# Altium PCB Bio_lock.PcbDoc
Units mm, origin at the board's own origin, x right, y up, seen from the top; angles counter-clockwise.
Board outline 73.66 x 101.6 mm, 2 copper layers (Top Layer, Bottom Layer); 17 components, 17 nets, 73 pads, 0 vias.
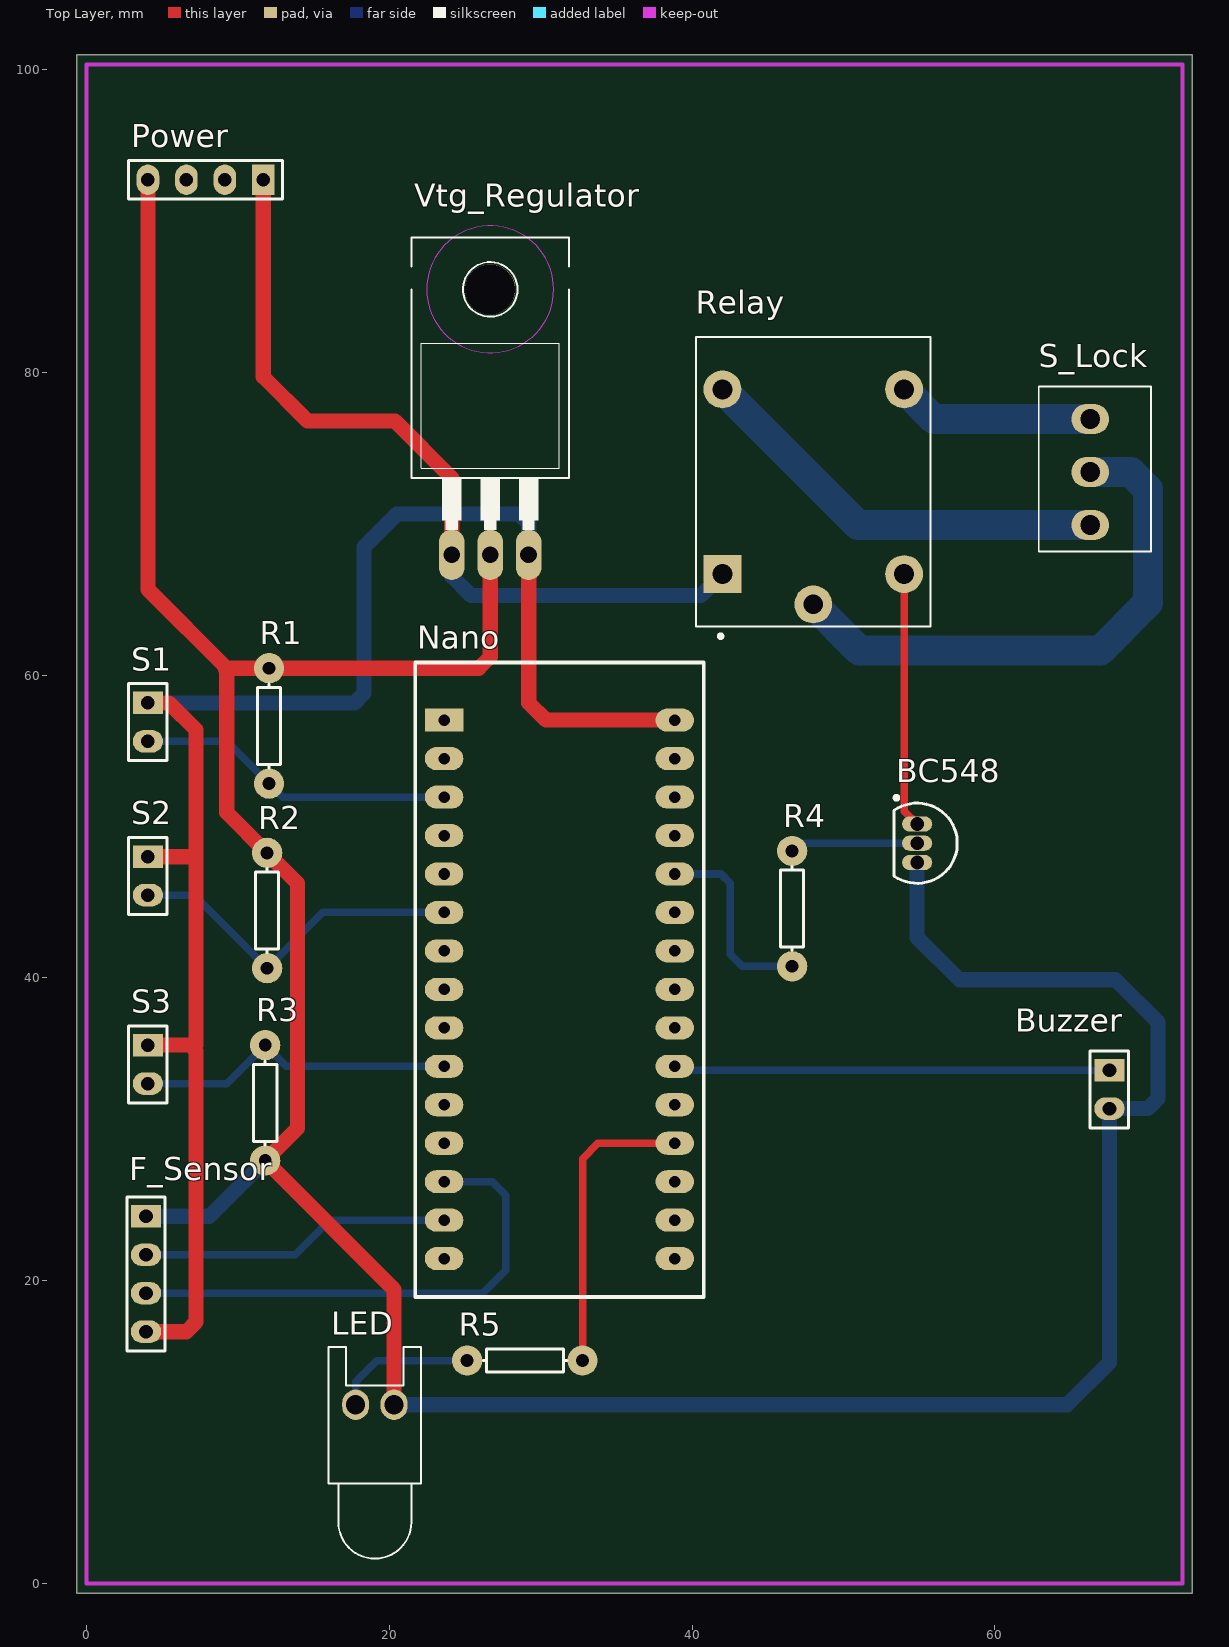
[diagram p0: Top Layer view]
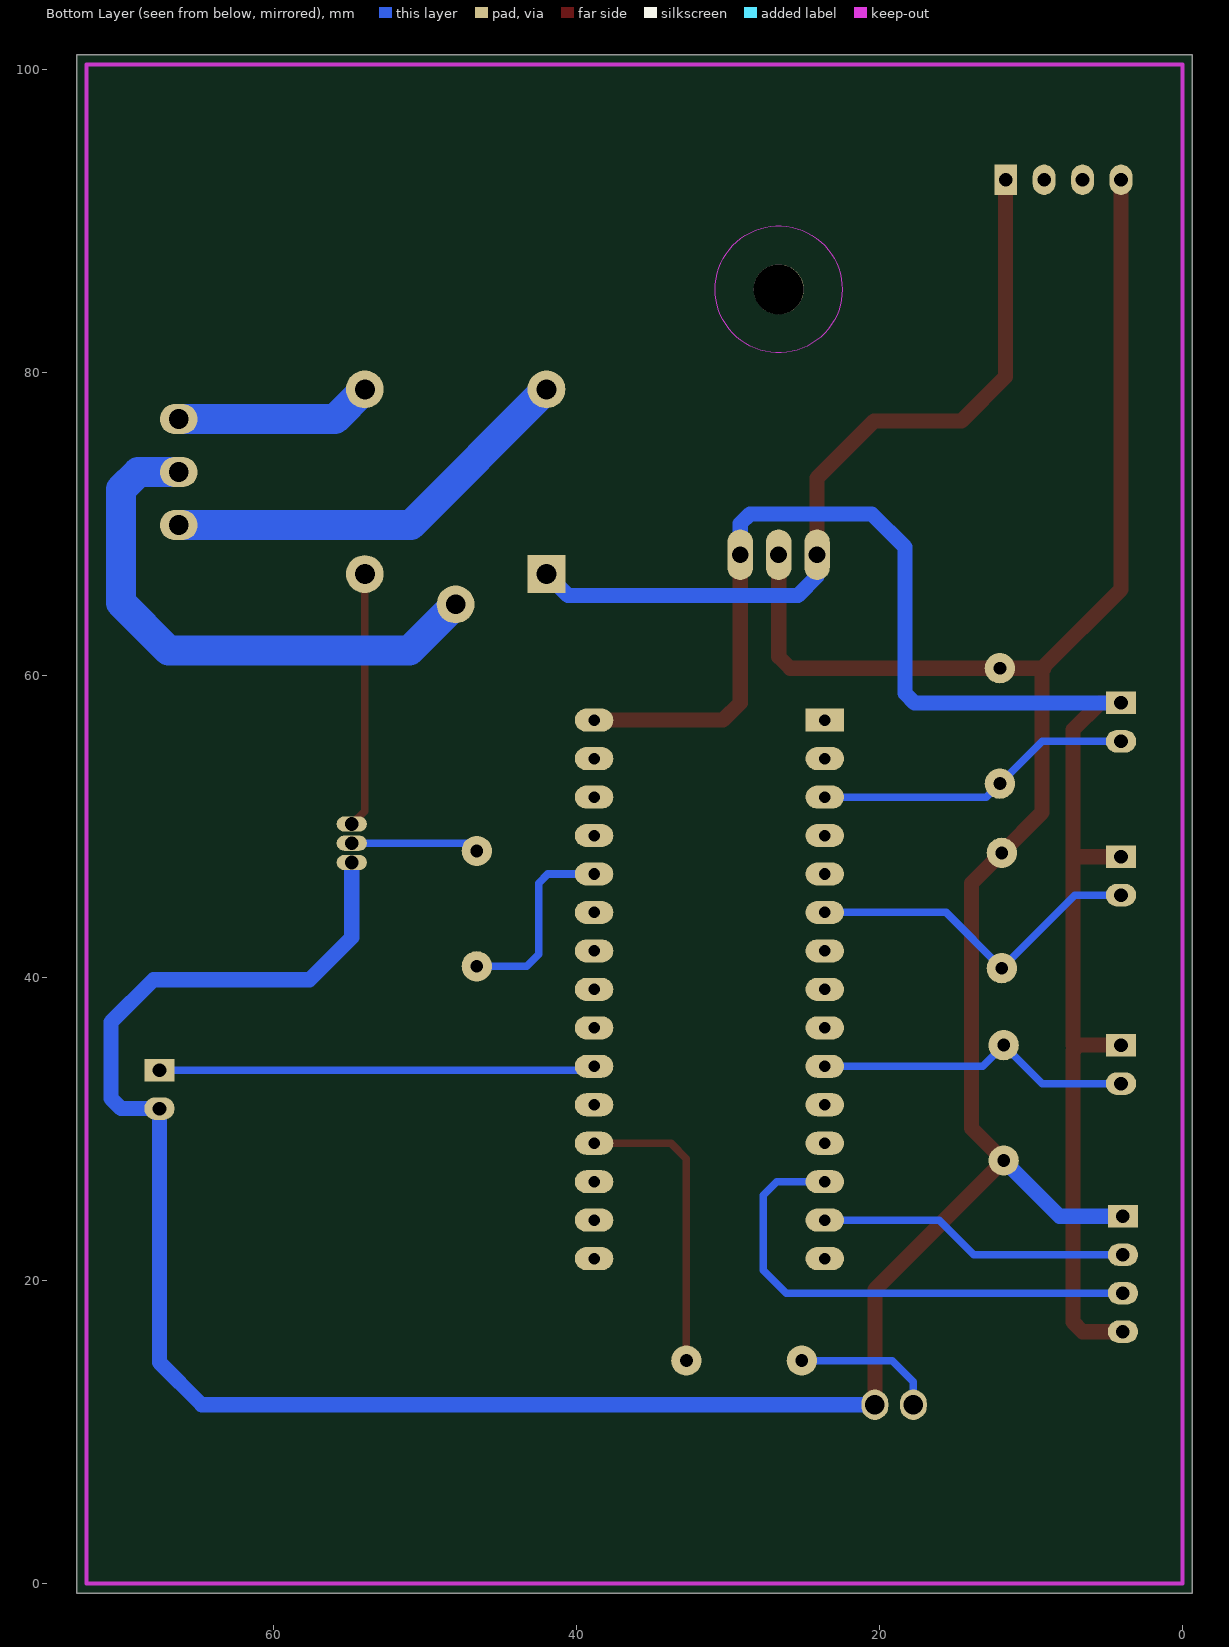
[diagram p1: Bottom Layer view, seen from below]

## Layer stack, top to bottom
Top Solder: solder mask 0.0102, Solder Resist, Dk 3.5
Top Layer: signal copper 0.0356
Dielectric 1: dielectric 0.32, FR-4, Dk 4.8
Bottom Layer: signal copper 0.0356
Bottom Solder: solder mask 0.0102, Solder Resist, Dk 3.5

## Board outline
-0.635,-0.635 73.025,-0.635 73.025,100.965 -0.635,100.965

## Design rules (kind name [scope] priority, off if disabled: settings)
Clearance [All] p1: gap=0.254 ignorepadtopadclearanceinfootprint=TRUE except(0: Arc-Hole Track-Hole SMDPad-Hole THPad-Hole Via-Hole Fill-Hole Poly-Hole Region-Hole Text-Hole; 0.5: Arc-THPad Track-THPad; 1: Arc-Arc Arc-Track Track-Track)
PolygonConnect [All] p1: connectstyle=Relief reliefconductorwidth=0.254 reliefentries=4 polygonreliefangle="90 Angle" airgapwidth=0.254
RoutingVias [All] p1: holewidth=0.711 width=1.27 viastyle="Through Hole" minholewidth=0.711 minwidth=1.27 maxholewidth=0.711 maxwidth=1.27
SolderMaskExpansion [All] p1: expansion=0.102
Width SOLENOID [(InNet('NetRelay_COM') OR InNet('NetRelay_NC') OR InNet('NetRelay_NO'))] p1: maxlimit=2 minlimit=2 preferedwidth=2
Width POWER [(InNet('GND') OR InNet('VCC') OR InNet('Vreg'))] p2: maxlimit=1 minlimit=0.5 preferedwidth=1
Width SIGNAL [All] p3: maxlimit=0.5 minlimit=0.5 preferedwidth=0.5
30 further rules are at their usual default settings.

## Components (designator, comment, footprint, x,y, rotation, side; value= is the part's Value field where it differs from the comment)
BC548 "NPN" TO-226-AA 54.864,48.895 r180 top
Buzzer "Header 2" HDR1X2 67.564,33.909 r270 top
F_Sensor "Header 4" HDR1X4 3.937,24.257 r270 top
LED "LED0" LED-0 19.05,11.811 r0 top
Nano "ARDUINO NANO" NANO 23.622,57.023 r0 top
Power "Header 4" HDR1X4 11.684,92.71 r180 top
R1 "Res1" AXIAL-0.3 12.065,56.642 r90 top value=10K
R2 "Res1" AXIAL-0.3 11.938,44.45 r90 top value=10K
R3 "Res1" AXIAL-0.3 11.811,31.75 r270 top value=10K
R4 "Res1" AXIAL-0.3 46.609,44.577 r90 top value=330
R5 "Res1" AXIAL-0.3 28.956,14.732 r0 top value=330
Relay "SRD-05VDC-SL-C" *RELAY_SRD-05VDC-SL-C_SRD-05VDC-SL-C(Primary) 48.006,72.771 r90 top
S1 "Header 2" HDR1X2 4.064,58.166 r270 top
S2 "Header 2" HDR1X2 4.064,48.006 r270 top
S3 "Header 2" HDR1X2 4.064,35.56 r270 top
S_Lock "691214110003" *691214110003 66.294,73.406 r270 top
Vtg_Regulator "LM7805" *TO220 26.67,74.295 r0 top

## Footprints (in the part's own frame and the unit in brackets; to place one, negate y for a bottom-side part, rotate by r counter-clockwise, add the part's x,y. Pads: shape width x height; smd on the part's side, far side on the other; paste and mask are expansions set on the pad)
*691214110003 [mm]
  oval 2x2.5 hole 1.3: 1(-3.5,0) 2(0,0) 3(3.5,0)
  silkscreen extent -5.65,-3.4 5.25,4
*RELAY_SRD-05VDC-SL-C_SRD-05VDC-SL-C(Primary) [mm]
  rect 2.5x2.5 hole 1.32: A1(-6.1,6)
  round 2.5 hole 1.32: A2(-6.1,-6) NC(6.1,6) NO(6.1,-6)
  round 2.5 hole 1.29: COM(-8.1,0)
  silkscreen extent -10.3,-7.75 9.55,7.75
*TO220 [mil]
  oval 66x132 hole 44: 1(-100,-250) 2(0,-250) 3(100,-250)
  round 130 hole 130 unplated: None(0,440)
  Keep-Out Layer circle w0: c0,440 r165
  Keep-Out Layer circle w0: c0,440 r165
  Keep-Out Layer circle w0: c0,440 r165
  Keep-Out Layer circle w0: c0,440 r165
  Keep-Out Layer circle w0: c0,440 r165
  Keep-Out Layer circle w0: c0,440 r165
  silkscreen extent -205,-185 205,575
AXIAL-0.3 [mm] "Axial Device, Thru-Hole; 2 Leads; 0.3 in Pin Spacing"
  round 2 hole 0.85: 1(-3.81,0) 2(3.81,0)
  silkscreen extent -2.77,-0.76 2.77,0.76
HDR1X2 [mm] "Connector; Header; 2 Position"
  rect 1.5x2 hole 0.9: 1(0,0)
  oval 1.5x2 hole 0.9: 2(2.54,0)
  silkscreen extent -1.27,-1.27 3.81,1.27
HDR1X4 [mm] "Connector; Header; 4 Position"
  rect 1.5x2 hole 0.9: 1(0,0)
  oval 1.5x2 hole 0.9: 2(2.54,0) 3(5.08,0) 4(7.62,0)
  silkscreen extent -1.27,-1.27 8.89,1.27
LED-0 [mm] "LED; 2 Leads"
  oval 1.778x2 hole 1.27: 1(1.27,0) 2(-1.27,0)
  silkscreen extent -3.05,-10.16 3.05,3.81
NANO [mil]
  rect 100x60 hole 30: 1(0,0)
  oval 100x60 hole 30: 2(0,-100) 3(0,-200) 4(0,-300) 5(0,-400) 6(0,-500) 7(0,-600) 8(0,-700) 9(0,-800) 10(0,-900) 11(0,-1000) 12(0,-1100) 13(0,-1200) 14(0,-1300) 15(0,-1400) 16(600,-1400) 17(600,-1300) 18(600,-1200) 19(600,-1100) 20(600,-1000) 21(600,-900) 22(600,-800) 23(600,-700) 24(600,-600) 25(600,-500) 26(600,-400) 27(600,-300) 28(600,-200) 29(600,-100) 30(600,0)
  silkscreen extent -75,-1500 675,150, body extent -70,-1495 670,155, height 394
TO-226-AA [mm] "TO, Flat Index; 3 In-Line, Axial Leads; Body Dia. 4.8mm; Leads 0.55 x 0.51 mm (max)"
  oval 2x1 hole 0.9: 1(0,-1.27) 2(0,0) 3(0,1.27)
  silkscreen extent -2.65,-3.13 1.52,2.65, body extent -2.65,-2.66 1.52,2.66, height 5.33

## Part data
BC548: "NPN Bipolar Transistor", Code_JEDEC=TO-226-AA, LatestRevisionDate=17-Jul-2002, LatestRevisionNote="Re-released for DXP Platform.", PackageDescription="TO, Flat Index; 3 In-Line, Axial Leads; Body Dia. 4.8mm; Leads 0.55 x 0.51 mm (max)", PackageReference=TO-226-AA, Published=8-Jun-2000, Publisher="Altium Limited"
Buzzer S1 S2 S3: "Header, 2-Pin", LatestRevisionDate=17-Jul-2002, LatestRevisionNote="Re-released for DXP Platform.", Publisher="Altium Limited"
F_Sensor Power: "Header, 4-Pin", LatestRevisionDate=17-Jul-2002, LatestRevisionNote="Re-released for DXP Platform.", Publisher="Altium Limited"
LED: "Typical INFRARED GaAs LED", LatestRevisionDate=08-Jul-2005, LatestRevisionNote="Mech Layer 1 removed.", PackageDescription="LED; 2 Leads", PackageReference=LED-0, Published=8-Jun-2000, Publisher="Altium Limited"
Nano: library part NANO
R1 R2 R3 R4 R5: "Resistor", LatestRevisionDate=17-Jul-2002, LatestRevisionNote="Re-released for DXP Platform.", PackageDescription="Axial Device, Thru-Hole; 2 Leads; 0.3 in Pin Spacing", PackageReference=AXIAL-0.3, Published=8-Jun-2000, Publisher="Altium Limited"
Relay: "5V Trigger Relay Module For Arduino And Raspberry Pi 5V Trigger Relay Module For Arduino And Raspberry Pi", Package=None, Availability=Unavailable, MF="Songle Relay", MP=SRD-05VDC-SL-C, Price=None, SnapEDA_Link=https://www.snapeda.com/parts/SRD-05VDC-SL-C/Songle%20Relay/view-part/1029484/?ref=snap
S_Lock: "3 Position Wire to Board Terminal Block Horizontal with Board 0.138 _3.50mm_ Through Hole", Package=None, Availability=Unavailable, MF="Wurth Electronics", MP=691214110003, Price=None, SnapEDA_Link=https://www.snapeda.com/parts/691214110003/Wurth%20Electronics%20Inc./view-part/1195098/?ref=snap
Vtg_Regulator: "Linear Voltage Regulator IC 1 Output 1.5A SOT-223-4", Package="TO-220 Texas Instruments", Availability=Unavailable, MF="Texas Instruments", MP=LM7805, Price=None, SnapEDA_Link=https://www.snapeda.com/parts/LM7805/Texas%20Instruments/view-part/2302466/?ref=snap

## Nets (pads, with @x,y where several pads share a name; then routed paths per layer and width w, separated by ;. In a path a pad name is that pad's centre, name@x,y a point inside that pad or via, vN(x,y) a via of type N, cw(c..) or ccw(c..) an arc to the next point about the centre after c; other vN are vias at no path point)
GND: BC548.3 Buzzer.2 F_Sensor.1 LED.1 Power.4 R1.2 R2.2 R3.2 Vtg_Regulator.2 | length 219.8
  Top Layer w1: Power.4 4.064,65.659 9.271,60.452 ; 9.144,60.452 9.271,60.452 ; LED.1 20.32,19.431 R3.2 13.945,30.074 13.945,46.253 R2.2 9.271,50.927 9.271,60.452 ; Vtg_Regulator.2 26.67,61.214 25.908,60.452 R1.2 9.271,60.452
  Bottom Layer w1: F_Sensor.1 8.128,24.257 R3.2 ; LED.1 64.77,11.811 67.564,14.605 Buzzer.2 70.104,31.369 70.763,32.028 70.763,37.084 67.969,39.878 57.658,39.878 54.864,42.672 BC548.3@54.864,47.145
NetBC548_1: BC548.1 Relay.A2 | length 16.9
  Top Layer w0.5: Relay.A2 54.006,51.023 BC548.1
NetBC548_2: BC548.2 R4.2 | length 8.5
  Bottom Layer w0.5: R4.2 47.117,48.895 BC548.2
NetBuzzer_1: Buzzer.1 Nano.21 | length 28.8
  Bottom Layer w0.5: Nano.21 39.116,33.909 Buzzer.1
NetF_Sensor_2: F_Sensor.2 Nano.14 | length 20.6
  Bottom Layer w0.5: F_Sensor.2 13.792,21.717 16.078,24.003 Nano.14
NetF_Sensor_3: F_Sensor.3 Nano.13 | length 33.8
  Bottom Layer w0.5: F_Sensor.3 26.162,19.177 27.686,20.701 27.686,25.654 26.797,26.543 Nano.13
NetLED_2: LED.2 R5.1 | length 9.5
  Bottom Layer w0.5: LED.2 17.78,13.335 19.177,14.732 R5.1
NetNano_3: Nano.3 R1.1 S1.2 | length 21.1
  Bottom Layer w0.5: S1.2 9.271,55.626 R1.1 12.954,51.943 Nano.3
NetNano_6: Nano.6 R2.1 S2.2 | length 23.1
  Bottom Layer w0.5: S2.2 7.112,45.466 R2.1 15.621,44.323 Nano.6
NetNano_10: Nano.10 R3.1 S3.2 | length 21.2
  Bottom Layer w0.5: S3.2 9.271,33.02 R3.1 13.208,34.163 Nano.10
NetNano_19: Nano.19 R5.2 | length 19.9
  Top Layer w0.5: R5.2 32.766,28.067 33.782,29.083 Nano.19
NetNano_26: Nano.26 R4.1 | length 13.9
  Bottom Layer w0.5: Nano.26 41.91,46.863 42.513,46.26 42.513,41.561 43.307,40.767 45.974,40.767 46.609,41.402 R4.1
NetRelay_COM: Relay.COM S_Lock.2 | length 36.4
  Bottom Layer w2: Relay.COM 51.057,61.62 66.954,61.62 70.104,64.77 70.104,72.263 68.961,73.406 S_Lock.2
NetRelay_NC: Relay.NC S_Lock.3 | length 28
  Bottom Layer w2: Relay.NC 50.971,69.906 S_Lock.3
NetRelay_NO: Relay.NO S_Lock.1 | length 13.1
  Bottom Layer w2: Relay.NO 55.971,76.906 S_Lock.1
VCC: Power.1 Relay.A1 Vtg_Regulator.1 | length 53.7
  Top Layer w1: Power.1 11.684,79.705 14.605,76.784 20.371,76.784 24.13,73.025 Vtg_Regulator.1
  Bottom Layer w1: Vtg_Regulator.1 24.13,66.523 25.4,65.253 40.588,65.253 Relay.A1
Vreg: F_Sensor.4 Nano.30 S1.1 S2.1 S3.1 Vtg_Regulator.3 | length 111.2
  Top Layer w1: F_Sensor.4 6.604,16.637 7.239,17.272 7.239,35.179 6.858,35.56 ; S3.1 6.858,35.56 ; S2.1 7.112,48.006 ; S1.1 5.461,58.166 7.239,56.388 7.239,35.56 6.858,35.56 ; Vtg_Regulator.3 29.21,58.166 30.353,57.023 Nano.30
  Bottom Layer w1: S1.1 17.704,58.166 18.339,58.801 18.339,68.453 20.523,70.637 28.575,70.637 29.21,70.002 Vtg_Regulator.3
pads on no net: Nano.1 Nano.2 Nano.4 Nano.5 Nano.7 Nano.8 Nano.9 Nano.11 Nano.12 Nano.15 Nano.16 Nano.17 Nano.18 Nano.20 Nano.22 Nano.23 Nano.24 Nano.25 Nano.27 Nano.28 Nano.29 Power.2 Power.3 Vtg_Regulator.None

## Keep-outs
Keep-Out Layer:
  lines w0.254: 0,0 0,100.33 72.39,100.33 72.39,0 0,0

## Text inside footprints (layer, text, board x,y; h text height)
S_Lock: Mechanical 4 "1" at 63.294,77.406 h1.88 r270; Mechanical 4 "1" at 63.294,77.406 h1.88 r270
Vtg_Regulator: Mechanical 4 "3" at 28.575,74.045 h1.88; Mechanical 4 "2" at 26.034,74.045 h1.88; Mechanical 4 "1" at 23.489,74.045 h1.88; Mechanical 4 "3" at 28.575,74.045 h1.88; Mechanical 4 "2" at 26.034,74.045 h1.88; Mechanical 4 "1" at 23.489,74.045 h1.88